# Altium PCB Terminal_Board_PCB V4.PcbDoc (part 2 of 2)
Units mm, origin at the board's own origin, x right, y up, seen from the top; angles counter-clockwise.
Board outline 240.8 x 116.8 mm, 2 copper layers (Top Layer, Bottom Layer), stack 0.74 mm thick; 18 components, 37 nets, 96 pads, 39 vias.
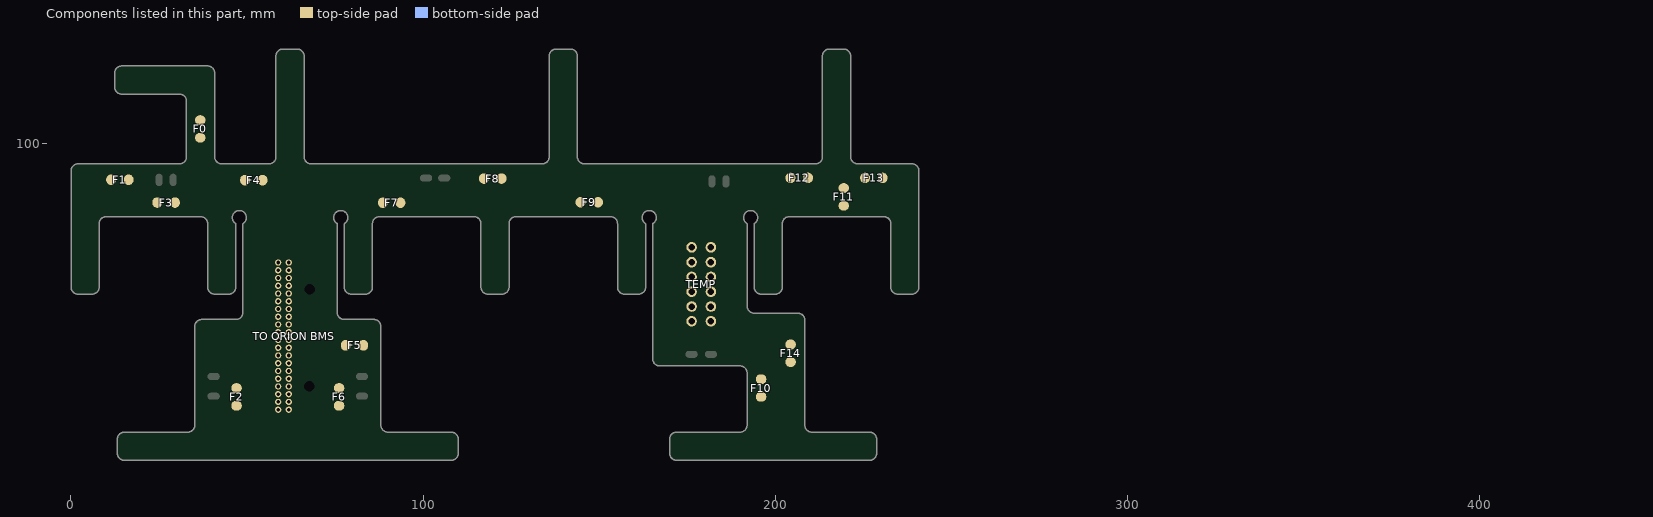
[diagram p2: the components of this part, seen from the top]

## Via types
v1: diameter 1.27, hole 0.5, Top Layer to Bottom Layer, tented both sides, 39 vias

## Nets (pads, with @x,y where several pads share a name; then routed paths per layer and width w, separated by ;. In a path a pad name is that pad's centre, name@x,y a point inside that pad or via, vN(x,y) a via of type N, cw(c..) or ccw(c..) an arc to the next point about the centre after c; other vN are vias at no path point) (continued)
copper on no net: | length 8872.6
  Top Layer w0.025: 286.048,39.384 287.858,37.573 ; 286.048,40.908 289.382,37.573 ; 286.048,42.432 290.654,37.826 ; 286.048,43.956 291.168,38.835 ; 286.048,45.48 291.168,40.359 ; 286.048,47.004 291.168,41.883 ; 286.048,48.528 291.168,43.407 ; 286.048,50.052 291.168,44.931 ; 286.048,51.576 291.168,46.455 ; 286.048,53.1 291.168,47.979 ; 286.048,54.624 291.168,49.503 ; 286.048,56.148 291.289,50.906 ; 286.048,57.672 292.112,51.607 ; 286.048,59.196 293.588,51.656 ; 286.179,60.588 295.112,51.656 ; 287.03,61.262 296.636,51.656 ; 288.52,61.296 298.16,51.656 ; 290.044,61.296 299.684,51.656 ; 291.568,61.296 301.208,51.656 ; 293.092,61.296 302.732,51.656 ; 293.978,75.649 295.697,73.931 ; 293.978,77.173 297.221,73.931 ; 294.178,78.498 298.745,73.931 ; 294.459,9.636 296.729,7.366 ; 294.459,11.16 298.253,7.366 ; 294.616,61.296 304.256,51.656 ; 294.741,7.83 294.929,7.643 ; 294.916,12.227 299.777,7.366 ; 295.113,79.087 300.269,73.931 ; 296.14,61.296 305.78,51.656 ; 296.147,12.52 301.301,7.366 ; 296.633,79.091 301.793,73.931 ; 297.664,61.296 307.304,51.656 ; 297.671,12.52 302.825,7.366 ; 298.157,79.091 303.317,73.931 ; 299.188,61.296 308.828,51.656 ; 299.195,12.52 304.349,7.366 ; 299.681,79.091 304.841,73.931 ; 300.712,61.296 316.004,46.003 ; 300.719,12.52 305.873,7.366 ; 301.205,79.091 312.157,68.138 ; 302.236,61.296 316.004,47.527 ; 302.243,12.52 307.397,7.366 ; 302.729,79.091 312.157,69.662 ; 303.76,61.296 316.004,49.051 ; 303.767,12.52 308.921,7.366 ; 304.253,79.091 312.157,71.186 ; 305.284,61.296 315.416,51.164 ; 305.291,12.52 310.445,7.366 ; 305.777,79.091 312.157,72.71 ; 306.538,61.566 315.73,52.374 ; 306.815,12.52 311.969,7.366 ; 307.036,62.591 316.896,52.732 ; 307.036,64.115 334.439,36.712 ; 307.036,65.639 334.439,38.236 ; 307.036,67.163 334.439,39.76 ; 307.036,68.687 312.157,63.566 ; 307.036,70.211 312.157,65.09 ; 307.036,71.735 312.157,66.614 ; 307.301,79.091 312.157,74.234 ; 308.059,12.801 313.493,7.366 ; 308.541,13.842 315.017,7.366 ; 308.541,15.366 316.541,7.366 ; 308.541,16.89 318.065,7.366 ; 308.541,18.414 319.589,7.366 ; 308.541,19.938 321.113,7.366 ; 308.541,21.462 322.637,7.366 ; 308.541,22.986 324.161,7.366 ; 308.541,24.51 325.685,7.366 ; 308.541,26.034 327.209,7.366 ; 308.541,27.558 328.733,7.366 ; 308.541,29.082 330.257,7.366 ; 308.541,30.606 331.781,7.366 ; 308.588,32.084 333.305,7.366 ; 308.825,79.091 312.157,75.758 ; 309.302,32.894 334.829,7.366 ; 310.349,79.091 312.157,77.282 ; 310.716,33.004 336.353,7.366 ; 310.883,38.932 312.242,37.573 ; 310.883,40.456 313.766,37.573 ; 310.883,41.98 315.199,37.665 ; 310.883,43.504 315.941,38.446 ; 310.883,45.028 316.004,39.907 ; 310.883,46.552 316.004,41.431 ; 310.883,48.076 316.004,42.955 ; 310.883,49.6 316.004,44.479 ; 312.24,33.004 337.877,7.366 ; 313.764,33.004 339.401,7.366 ; 314.428,61.296 334.439,41.284 ; 315.288,33.004 340.925,7.366 ; 315.952,61.296 334.439,42.808 ; 316.64,33.176 342.449,7.366 ; 317.262,34.077 343.973,7.366 ; 317.284,35.579 345.497,7.366 ; 317.284,37.103 347.021,7.366 ; 317.284,38.627 342.411,13.501 ; 317.284,40.151 342.37,15.066 ; 317.284,41.675 342.37,16.59 ; 317.284,43.199 342.37,18.114 ; 317.284,44.723 342.37,19.638 ; 317.284,46.247 342.37,21.162 ; 317.284,47.771 342.37,22.686 ; 317.284,49.295 342.37,24.21 ; 317.476,61.296 334.439,44.332 ; 317.512,50.592 342.37,25.734 ; 317.895,51.732 334.439,35.188 ; 319,61.296 334.439,45.856 ; 320.524,61.296 334.439,47.38 ; 322.046,61.297 334.439,48.904 ; 323.048,61.82 333.954,50.913 ; 323.301,63.09 334.098,52.294 ; 323.301,64.614 335.159,52.757 ; 323.301,66.138 340.84,48.599 ; 323.301,67.662 328.424,62.54 ; 323.301,69.186 328.422,64.065 ; 323.301,70.71 328.422,65.589 ; 323.301,72.234 328.422,67.113 ; 323.301,73.758 328.422,68.637 ; 323.301,75.282 328.422,70.161 ; 323.301,76.806 328.422,71.685 ; 323.301,78.33 328.422,73.209 ; 323.301,79.854 328.422,74.733 ; 323.372,81.308 328.422,76.257 ; 324.124,82.079 328.422,77.781 ; 325.57,82.158 328.422,79.305 ; 327.094,82.158 328.422,80.829 ; 329.666,61.298 340.84,50.123 ; 331.192,61.296 341.215,51.272 ; 332.716,61.296 342.356,51.656 ; 334.24,61.296 343.88,51.656 ; 335.719,40.004 338.15,37.573 ; 335.719,41.528 339.674,37.573 ; 335.719,43.052 340.626,38.145 ; 335.719,44.576 340.84,39.455 ; 335.719,46.1 340.84,40.979 ; 335.719,47.624 340.84,42.503 ; 335.719,49.148 340.84,44.027 ; 335.764,61.296 345.404,51.656 ; 335.803,38.396 336.542,37.657 ; 335.87,50.522 340.84,45.551 ; 336.349,51.566 340.84,47.075 ; 336.624,33.004 342.37,27.258 ; 337.288,61.296 346.928,51.656 ; 338.148,33.004 342.37,28.782 ; 338.812,61.296 348.452,51.656 ; 339.672,33.004 342.37,30.306 ; 340.336,61.296 349.976,51.656 ; 341.196,33.004 342.37,31.83 ; 341.86,61.296 351.5,51.656 ; 343.35,12.561 348.545,7.366 ; 343.384,61.296 353.024,51.656 ; 344.908,61.296 354.548,51.656 ; 344.915,12.52 350.069,7.366 ; 346.432,61.296 356.072,51.656 ; 346.439,12.52 351.593,7.366 ; 347.956,61.296 357.596,51.656 ; 347.963,12.52 353.117,7.366 ; 349.48,61.296 359.12,51.656 ; 349.487,12.52 354.641,7.366 ; 351.004,61.296 365.676,46.624 ; 351.011,12.52 355.926,7.605 ; 352.528,61.296 365.676,48.148 ; 352.535,12.52 356.452,8.603 ; 354.052,61.296 365.676,49.672 ; 354.059,12.52 356.452,10.127 ; 355.576,61.296 365.853,51.018 ; 355.694,12.41 356.341,11.762 ; 357.1,61.296 366.76,51.635 ; 358.624,61.296 368.264,51.656 ; 360.148,61.296 369.788,51.656 ; 360.555,39.552 362.534,37.573 ; 360.555,41.076 364.058,37.573 ; 360.555,42.6 365.254,37.901 ; 360.555,44.124 365.676,39.004 ; 360.555,45.648 365.676,40.528 ; 360.555,47.172 365.676,42.052 ; 360.555,48.696 365.676,43.576 ; 360.555,50.22 365.676,45.1 ; 361.672,61.296 371.312,51.656 ; 363.196,61.296 372.836,51.656 ; 364.72,61.296 374.36,51.656 ; 366.244,61.296 375.884,51.656 ; 367.768,61.296 377.408,51.656 ; 369.292,61.296 378.932,51.656 ; 370.816,61.296 380.456,51.656 ; 372.22,61.416 381.98,51.656 ; 372.924,62.235 383.504,51.656 ; 372.973,63.71 390.512,46.172 ; 372.973,65.234 390.512,47.696 ; 372.973,66.758 390.512,49.22 ; 372.973,68.282 378.094,63.162 ; 372.973,69.806 378.094,64.686 ; 372.973,71.33 378.094,66.21 ; 372.973,72.854 378.094,67.734 ; 372.973,74.378 378.094,69.258 ; 372.973,75.902 378.094,70.782 ; 372.973,77.426 378.094,72.306 ; 372.973,78.95 378.094,73.83 ; 372.973,80.474 378.094,75.354 ; 373.266,81.706 378.094,76.878 ; 374.338,82.158 378.094,78.402 ; 375.862,82.158 378.094,79.926 ; 379.96,61.296 389.887,51.369 ; 381.484,61.296 390.326,52.454 ; 383.008,61.296 391.646,52.658 ; 384.532,61.296 408.947,36.881 ; 385.391,39.1 386.918,37.573 ; 385.391,40.624 388.442,37.573 ; 385.391,42.148 389.826,37.714 ; 385.391,43.672 390.483,38.581 ; 385.391,45.196 390.512,40.076 ; 385.391,46.72 390.512,41.6 ; 385.391,48.244 390.512,43.124 ; 385.391,49.768 390.512,44.648 ; 386.056,61.296 408.947,38.405 ; 387.58,61.296 408.947,39.929 ; 389.104,61.296 408.947,41.453 ; 390.628,61.296 408.947,42.977 ; 391.683,83.42 394.217,85.954 397.265,89.002 ; 391.683,84.944 392.693,85.954 395.741,89.002 ; 391.683,86.468 394.217,89.002 ; 391.683,87.992 392.693,89.002 ; 391.683,95.612 394.217,98.146 397.265,101.194 400.313,104.242 ; 391.683,97.136 392.693,98.146 395.741,101.194 398.789,104.242 ; 391.683,98.66 394.217,101.194 397.265,104.242 ; 391.683,100.184 392.693,101.194 395.741,104.242 ; 391.683,101.708 394.217,104.242 ; 391.683,103.232 392.693,104.242 ; 391.683,113.9 394.217,116.434 397.265,119.482 ; 391.683,115.424 392.693,116.434 395.741,119.482 ; 391.683,116.948 394.217,119.482 ; 391.683,118.472 392.693,119.482 ; 391.792,26.603 393.88,24.515 ; 391.792,28.127 395.404,24.515 ; 391.792,29.651 396.928,24.515 ; 391.792,31.175 398.452,24.515 ; 391.792,32.699 399.976,24.515 ; 391.792,34.223 401.5,24.515 ; 391.792,35.747 403.024,24.515 ; 391.792,37.271 404.548,24.515 ; 391.792,38.795 406.072,24.515 ; 391.792,40.319 407.596,24.515 ; 391.792,41.843 419.438,14.198 ; 391.792,43.367 419.438,15.722 ; 391.792,44.891 419.438,17.246 ; 391.792,46.415 419.438,18.77 ; 391.792,47.939 419.438,20.294 ; 391.792,49.463 419.438,21.818 ; 392.107,50.672 419.438,23.342 ; 392.152,61.296 408.947,44.501 ; 392.334,51.97 408.951,35.353 ; 392.693,82.906 395.741,85.954 398.789,89.002 ; 392.693,95.098 395.741,98.146 398.789,101.194 401.837,104.242 ; 392.693,113.386 395.741,116.434 398.789,119.482 ; 393.676,61.296 408.947,46.025 ; 394.217,82.906 397.265,85.954 400.313,89.002 ; 394.217,95.098 397.265,98.146 400.313,101.194 403.361,104.242 ; 394.217,113.386 397.265,116.434 400.313,119.482 ; 394.865,9.815 397.313,7.366 ; 394.865,11.339 398.837,7.366 ; 394.932,8.224 395.728,7.428 ; 395.2,61.296 408.947,47.549 ; 395.427,12.3 400.361,7.366 ; 395.741,82.906 398.789,85.954 401.837,89.002 ; 395.741,95.098 398.789,98.146 401.837,101.194 404.885,104.242 ; 395.741,113.386 398.789,116.434 401.837,119.482 ; 396.724,61.296 408.947,49.073 ; 396.731,12.52 401.885,7.366 ; 397.265,82.906 400.313,85.954 403.361,89.002 ; 397.265,95.098 400.313,98.146 403.361,101.194 406.409,104.242 ; 397.265,113.386 400.313,116.434 403.361,119.482 ; 398.248,61.296 408.353,51.19 ; 398.255,12.52 403.409,7.366 ; 398.789,82.906 401.837,85.954 404.885,89.002 ; 398.789,95.098 401.837,98.146 404.885,101.194 407.933,104.242 ; 398.789,113.386 401.837,116.434 404.885,119.482 ; 399.772,61.296 408.682,52.385 ; 399.779,12.52 404.933,7.366 ; 400.313,82.906 403.361,85.954 406.409,89.002 ; 400.313,95.098 403.361,98.146 406.409,101.194 409.457,104.242 ; 400.313,113.386 403.361,116.434 406.409,119.482 ; 401.296,61.296 409.866,52.726 ; 401.303,12.52 406.457,7.366 ; 401.837,82.906 404.885,85.954 407.933,89.002 ; 401.837,95.098 404.885,98.146 407.933,101.194 410.981,104.242 ; 401.837,113.386 404.885,116.434 407.933,119.482 ; 402.82,61.296 415.348,48.768 ; 402.827,12.52 407.981,7.366 ; 403.361,82.906 406.409,85.954 409.457,89.002 ; 403.361,95.098 406.409,98.146 409.457,101.194 412.505,104.242 ; 403.361,113.386 406.409,116.434 409.457,119.482 ; 404.344,61.296 415.348,50.292 ; 404.351,12.52 409.505,7.366 ; 404.885,82.906 407.933,85.954 410.981,89.002 ; 404.885,95.098 407.933,98.146 410.981,101.194 414.029,104.242 417.077,101.194 420.125,98.146 423.173,95.098 426.221,92.05 429.269,89.002 ; 404.885,113.386 407.933,116.434 410.981,119.482 ; 405.868,61.296 415.807,51.357 ; 405.875,12.52 411.029,7.366 ; 406.409,82.906 409.457,85.954 412.505,89.002 ; 406.409,95.098 409.457,98.146 412.505,101.194 414.029,102.718 415.553,101.194 418.601,98.146 421.649,95.098 424.697,92.05 427.745,89.002 ; 406.409,113.386 409.457,116.434 412.505,119.482 ; 407.392,61.296 417.032,51.656 ; 407.399,12.52 412.553,7.366 ; 407.933,82.906 410.981,85.954 414.029,89.002 ; 407.933,95.098 410.981,98.146 414.029,101.194 417.077,98.146 420.125,95.098 423.173,92.05 426.221,89.002 ; 407.933,113.386 410.981,116.434 414.029,119.482 ; 408.559,12.884 414.077,7.366 ; 408.916,61.296 418.556,51.656 ; 408.947,14.021 415.601,7.366 ; 408.947,15.545 417.125,7.366 ; 408.947,17.069 418.649,7.366 ; 408.947,18.593 420.173,7.366 ; 408.947,20.117 421.697,7.366 ; 408.947,21.641 423.221,7.366 ; 408.947,23.165 424.745,7.366 ; 409.457,82.906 412.505,85.954 414.029,87.478 ; 409.457,95.098 412.505,98.146 414.029,99.67 415.553,98.146 418.601,95.098 421.649,92.05 424.697,89.002 ; 409.457,113.386 412.505,116.434 414.029,117.958 ; 410.144,34.16 419.438,24.866 ; 410.227,40.173 412.826,37.573 ; 410.227,41.697 414.324,37.599 ; 410.227,43.221 415.201,38.246 ; 410.227,44.745 415.348,39.624 ; 410.227,46.269 415.348,41.148 ; 410.227,47.793 415.348,42.672 ; 410.227,49.317 415.348,44.196 ; 410.247,38.629 411.283,37.593 ; 410.44,61.296 420.08,51.656 ; 410.466,50.602 415.348,45.72 ; 410.83,51.762 415.348,47.244 ; 410.981,82.906 414.029,85.954 ; 410.981,95.098 414.029,98.146 417.077,95.098 420.125,92.05 423.173,89.002 ; 410.981,113.386 414.029,116.434 ; 411.672,34.156 419.438,26.39 ; 411.964,61.296 421.604,51.656 ; 412.505,82.906 414.029,84.43 ; 412.505,95.098 414.029,96.622 415.553,95.098 418.601,92.05 421.649,89.002 ; 412.505,113.386 414.029,114.91 ; 413.196,34.156 419.438,27.914 ; 413.488,61.296 423.128,51.656 ; 414.029,90.526 415.553,89.002 ; 414.029,92.05 417.077,89.002 ; 414.029,93.574 415.553,92.05 418.601,89.002 ; 414.029,95.098 417.077,92.05 420.125,89.002 ; 414.029,105.766 415.553,104.242 418.601,101.194 421.649,98.146 424.697,95.098 427.745,92.05 430.793,89.002 ; 414.029,107.29 417.077,104.242 420.125,101.194 423.173,98.146 426.221,95.098 429.269,92.05 432.317,89.002 ; 414.029,108.814 415.553,107.29 418.601,104.242 421.649,101.194 424.697,98.146 427.745,95.098 430.793,92.05 433.841,89.002 ; 414.029,110.338 417.077,107.29 420.125,104.242 423.173,101.194 426.221,98.146 429.269,95.098 432.317,92.05 435.365,89.002 ; 414.029,111.862 415.553,110.338 418.601,107.29 421.649,104.242 424.697,101.194 427.745,98.146 430.793,95.098 433.841,92.05 436.889,89.002 ; 414.029,113.386 417.077,110.338 420.125,107.29 423.173,104.242 426.221,101.194 429.269,98.146 432.317,95.098 435.365,92.05 438.413,89.002 ; 414.72,34.156 419.438,29.438 ; 415.012,61.296 424.652,51.656 ; 415.553,113.386 418.601,110.338 421.649,107.29 424.697,104.242 427.745,101.194 430.793,98.146 433.841,95.098 436.889,92.05 439.937,89.002 ; 416.244,34.156 419.438,30.962 ; 416.536,61.296 426.176,51.656 ; 417.077,113.386 420.125,110.338 423.173,107.29 426.221,104.242 429.269,101.194 432.317,98.146 435.365,95.098 438.413,92.05 440.184,90.279 ; 417.768,34.156 419.438,32.486 ; 418.06,61.296 427.7,51.656 ; 418.601,113.386 421.649,110.338 424.697,107.29 427.745,104.242 430.793,101.194 433.841,98.146 436.889,95.098 439.937,92.05 440.184,91.803 ; 419.584,61.296 429.224,51.656 ; 420.125,113.386 423.173,110.338 426.221,107.29 429.269,104.242 432.317,101.194 435.365,98.146 438.413,95.098 440.184,93.327 ; 421.108,61.296 430.748,51.656 ; 421.115,12.52 426.269,7.366 ; 421.649,113.386 424.697,110.338 427.745,107.29 430.793,104.242 433.841,101.194 436.889,98.146 439.937,95.098 440.184,94.851 ; 422.259,61.669 432.272,51.656 ; 422.639,12.52 427.793,7.366 ; 422.645,62.807 433.797,51.655 ; 422.645,64.331 440.184,46.792 ; 422.645,65.855 440.184,48.316 ; 422.645,67.379 427.822,62.201 ; 422.645,68.903 427.766,63.782 ; 422.645,70.427 427.766,65.306 ; 422.645,71.951 427.766,66.83 ; 422.645,73.475 427.766,68.354 ; 422.645,74.999 427.766,69.878 ; 422.645,76.523 427.766,71.402 ; 422.645,78.047 427.766,72.926 ; 422.645,79.571 427.766,74.45 ; 422.659,81.08 427.766,75.974 ; 423.173,113.386 426.221,110.338 429.269,107.29 432.317,104.242 435.365,101.194 438.413,98.146 440.184,96.375 ; 423.275,81.988 427.766,77.498 ; 424.163,12.52 429.317,7.366 ; 424.63,82.158 427.766,79.022 ; 424.697,113.386 427.745,110.338 430.793,107.29 433.841,104.242 436.889,101.194 439.937,98.146 440.184,97.899 ; 425.687,12.52 430.841,7.366 ; 426.154,82.158 427.766,80.546 ; 426.221,113.386 429.269,110.338 432.317,107.29 435.365,104.242 438.413,101.194 440.184,99.423 ; 427.211,12.52 432.059,7.673 ; 427.745,113.386 430.793,110.338 433.841,107.29 436.889,104.242 439.937,101.194 440.184,100.947 ; 428.671,61.352 440.184,49.84 ; 428.735,12.52 432.496,8.759 ; 429.269,113.386 432.317,110.338 435.365,107.29 438.413,104.242 440.184,102.471 ; 430.252,61.296 440.184,51.364 ; 430.259,12.52 432.496,10.283 ; 430.793,113.386 433.841,110.338 436.889,107.29 439.937,104.242 440.184,103.995 ; 431.776,61.296 440.184,52.888 ; 432.317,113.386 435.365,110.338 438.413,107.29 440.184,105.519 ; 433.3,61.296 440.184,54.412 ; 433.841,113.386 436.889,110.338 439.937,107.29 440.184,107.043 ; 434.824,61.296 440.184,55.936 ; 435.063,39.721 437.21,37.573 ; 435.063,41.245 438.734,37.573 ; 435.063,42.769 439.846,37.986 ; 435.063,44.293 440.184,39.172 ; 435.063,45.817 440.184,40.696 ; 435.063,47.341 440.184,42.22 ; 435.063,48.865 440.184,43.744 ; 435.062,50.389 440.184,45.268 ; 435.365,113.386 438.413,110.338 440.184,108.567 ; 436.348,61.296 440.184,57.46 ; 436.889,113.386 439.937,110.338 440.184,110.091 ; 437.872,61.296 440.184,58.984 ; 438.413,113.386 440.184,111.615 ; 439.604,61.087 439.975,60.717 ; 439.937,113.386 440.184,113.139
  Top Layer w0.381: 286.048,85.954 296.459,85.954 346.482,85.954 360.703,85.954 377.209,85.954 391.683,85.954 414.029,85.954 440.184,85.954 ; 286.048,89.002 296.459,89.002 346.482,89.002 360.703,89.002 377.209,89.002 391.683,89.002 414.029,89.002 440.184,89.002 ; 286.048,92.05 296.459,92.05 346.482,92.05 360.703,92.05 377.209,92.05 391.683,92.05 414.029,92.05 440.184,92.05 ; 286.048,95.098 296.459,95.098 346.482,95.098 360.703,95.098 377.209,95.098 391.683,95.098 414.029,95.098 440.184,95.098 ; 286.048,98.146 296.459,98.146 346.482,98.146 360.703,98.146 377.209,98.146 391.683,98.146 414.029,98.146 440.184,98.146 ; 286.048,101.194 296.459,101.194 346.482,101.194 360.703,101.194 377.209,101.194 391.683,101.194 414.029,101.194 440.184,101.194 ; 286.048,104.242 296.459,104.242 346.482,104.242 360.703,104.242 377.209,104.242 391.683,104.242 414.029,104.242 440.184,104.242 ; 286.048,107.29 296.459,107.29 346.482,107.29 360.703,107.29 377.209,107.29 391.683,107.29 414.029,107.29 440.184,107.29 ; 286.048,110.338 296.459,110.338 346.482,110.338 360.703,110.338 377.209,110.338 391.683,110.338 414.029,110.338 440.184,110.338 ; 286.048,113.386 296.459,113.386 346.482,113.386 360.703,113.386 377.209,113.386 391.683,113.386 414.029,113.386 440.184,113.386 ; 286.048,116.434 296.459,116.434 346.482,116.434 360.703,116.434 377.209,116.434 391.683,116.434 414.029,116.434 440.184,116.434 ; 286.048,119.482 440.184,119.482 ; 296.459,122.53 296.459,82.906 ; 346.482,122.53 346.482,82.906 ; 360.703,122.53 360.703,82.906 ; 377.209,122.53 377.209,82.906 ; 391.683,122.53 391.683,82.906 ; 414.029,122.53 414.029,82.906 ; 296.459,82.906 286.048,82.906 286.048,122.53 440.184,122.53 440.184,82.906 414.029,82.906 ; 296.459,82.906 346.482,82.906 ; 346.482,82.906 360.703,82.906 ; 360.703,82.906 377.209,82.906 ; 377.209,82.906 391.683,82.906 ; 391.683,82.906 414.029,82.906 ; 286.048,38.747 286.048,38.873 286.048,59.996 286.048,60.122 286.097,60.37 286.193,60.603 286.333,60.812 286.512,60.991 286.721,61.131 286.954,61.227 287.202,61.277 287.328,61.277 305.756,61.277 305.882,61.283 306.128,61.332 306.36,61.428 306.568,61.567 306.746,61.745 306.885,61.953 306.981,62.185 307.03,62.431 307.036,62.557 307.036,72.67 307.03,72.796 306.981,73.042 306.885,73.274 306.746,73.482 306.568,73.66 306.36,73.799 306.128,73.895 305.882,73.944 305.756,73.95 295.259,73.95 295.132,73.95 294.885,74 294.652,74.096 294.442,74.236 294.264,74.415 294.124,74.624 294.028,74.857 293.978,75.105 293.978,75.231 293.978,77.791 293.978,77.917 294.028,78.165 294.124,78.398 294.264,78.607 294.442,78.786 294.652,78.926 294.885,79.022 295.132,79.071 295.259,79.071 310.877,79.071 311.003,79.071 311.25,79.022 311.483,78.926 311.693,78.786 311.871,78.607 312.012,78.398 312.108,78.165 312.157,77.917 312.157,77.791 312.157,62.557 312.163,62.431 312.212,62.185 312.308,61.953 312.448,61.745 312.625,61.567 312.834,61.428 313.066,61.332 313.312,61.283 313.437,61.277 317.729,61.277 322.021,61.277 322.147,61.283 322.393,61.332 322.625,61.428 322.833,61.567 323.011,61.745 323.15,61.953 323.246,62.185 323.295,62.431 323.301,62.557 323.301,80.864 323.301,80.99 323.351,81.237 323.447,81.47 323.587,81.68 323.676,81.769 323.765,81.858 323.975,81.998 324.208,82.095 324.455,82.144 324.582,82.144 325.862,82.144 327.142,82.144 327.268,82.144 327.515,82.095 327.748,81.998 327.958,81.858 328.047,81.769 328.136,81.68 328.276,81.47 328.373,81.237 328.422,80.99 328.422,80.864 328.422,62.557 328.428,62.431 328.477,62.185 328.573,61.953 328.713,61.745 328.89,61.567 329.099,61.428 329.331,61.332 329.577,61.283 329.702,61.277 350.698,61.277 371.693,61.277 371.818,61.283 372.065,61.332 372.296,61.428 372.505,61.567 372.683,61.745 372.822,61.953 372.918,62.185 372.967,62.431 372.973,62.557 372.973,80.864 372.973,80.99 373.022,81.237 373.119,81.47 373.259,81.68 373.437,81.858 373.647,81.998 373.88,82.095 374.127,82.144 374.253,82.144 375.534,82.144 376.814,82.144 376.94,82.144 377.187,82.095 377.42,81.998 377.63,81.858 377.719,81.769 377.808,81.68 377.948,81.47 378.045,81.237 378.094,80.99 378.094,80.864 378.094,62.557 378.1,62.431 378.149,62.185 378.245,61.953 378.385,61.745 378.562,61.567 378.771,61.428 379.003,61.332 379.249,61.283 379.374,61.277 400.369,61.277 421.365,61.277 421.49,61.283 421.736,61.332 421.968,61.428 422.177,61.567 422.354,61.745 422.494,61.953 422.59,62.185 422.639,62.431 422.645,62.557 422.645,80.864 422.645,80.99 422.694,81.237 422.791,81.47 422.931,81.68 423.109,81.858 423.319,81.998 423.552,82.095 423.799,82.144 423.925,82.144 425.205,82.144 426.486,82.144 426.569,82.144 426.736,82.122 426.898,82.078 427.053,82.014 427.198,81.93 427.331,81.828 427.45,81.71 427.552,81.576 427.594,81.504 427.636,81.431 427.7,81.276 427.744,81.114 427.766,80.947 427.766,80.864 427.766,62.557 427.772,62.431 427.821,62.185 427.917,61.953 428.056,61.745 428.234,61.567 428.442,61.428 428.674,61.332 428.92,61.283 429.046,61.277 438.904,61.277 439.03,61.277 439.277,61.227 439.51,61.131 439.72,60.991 439.809,60.902 439.898,60.812 440.038,60.603 440.135,60.37 440.184,60.122 440.184,59.996 440.184,38.873 440.184,38.747 440.135,38.5 440.038,38.267 439.898,38.057 439.72,37.879 439.51,37.738 439.277,37.642 439.03,37.593 438.903,37.593 436.343,37.593 436.217,37.593 435.97,37.642 435.737,37.738 435.527,37.879 435.349,38.057 435.209,38.267 435.112,38.5 435.063,38.747 435.063,38.873 435.063,50.395 435.057,50.52 435.008,50.766 434.912,50.998 434.772,51.207 434.595,51.384 434.386,51.524 434.154,51.62 433.908,51.669 433.783,51.675 416.628,51.675 416.525,51.671 416.322,51.638 416.127,51.573 415.945,51.477 415.86,51.419 415.802,51.373 415.694,51.271 415.599,51.157 415.518,51.033 415.452,50.9 415.401,50.761 415.367,50.616 415.35,50.469 415.348,50.395 415.348,38.873 415.348,38.747 415.299,38.5 415.202,38.267 415.062,38.057 414.884,37.879 414.674,37.738 414.441,37.642 414.194,37.593 414.068,37.593 411.507,37.593 411.381,37.593 411.134,37.642 410.901,37.739 410.691,37.879 410.602,37.968 410.513,38.057 410.373,38.267 410.276,38.5 410.227,38.747 410.227,38.873 410.227,50.395 410.344,50.471 410.549,50.659 410.709,50.888 410.816,51.145 410.864,51.42 410.852,51.698 410.78,51.967 410.651,52.215 410.472,52.428 410.251,52.598 409.998,52.716 409.726,52.776 409.447,52.776 409.175,52.716 408.923,52.598 408.702,52.428 408.522,52.215 408.394,51.967 408.322,51.698 408.309,51.42 408.358,51.145 408.465,50.888 408.624,50.659 408.83,50.471 408.947,50.395 408.947,35.416 408.953,35.291 409.002,35.045 409.098,34.813 409.237,34.604 409.415,34.427 409.624,34.287 409.855,34.191 410.102,34.142 410.227,34.136 418.158,34.136 418.284,34.136 418.531,34.087 418.764,33.991 418.974,33.85 419.063,33.761 419.152,33.672 419.292,33.462 419.389,33.229 419.438,32.982 419.438,32.856 419.438,13.781 419.444,13.656 419.493,13.409 419.589,13.178 419.729,12.969 419.906,12.791 420.115,12.652 420.347,12.556 420.593,12.507 420.718,12.501 431.216,12.501 431.342,12.501 431.589,12.452 431.822,12.355 432.032,12.215 432.21,12.037 432.35,11.827 432.447,11.594 432.496,11.347 432.496,11.221 432.496,9.94 432.496,8.66 432.496,8.534 432.447,8.287 432.35,8.054 432.21,7.844 432.121,7.755 432.032,7.666 431.822,7.526 431.589,7.429 431.342,7.38 431.216,7.38 396.145,7.38 396.019,7.38 395.771,7.429 395.538,7.526 395.329,7.666 395.24,7.755 395.15,7.844 395.01,8.054 394.914,8.287 394.865,8.534 394.865,8.66 394.865,9.94 394.865,11.221 394.865,11.347 394.914,11.594 395.01,11.827 395.15,12.037 395.329,12.215 395.538,12.355 395.771,12.452 396.019,12.501 396.145,12.501 407.667,12.501 407.792,12.507 408.038,12.556 408.27,12.652 408.479,12.791 408.572,12.876 408.656,12.969 408.796,13.178 408.892,13.409 408.941,13.656 408.947,13.781 408.947,18.518 408.947,23.255 408.941,23.38 408.892,23.626 408.796,23.858 408.656,24.067 408.479,24.244 408.27,24.384 408.038,24.48 407.792,24.529 407.667,24.535 393.072,24.535 392.946,24.535 392.699,24.584 392.466,24.68 392.256,24.821 392.078,24.999 391.938,25.209 391.841,25.442 391.792,25.689 391.792,25.815 391.792,50.395 391.909,50.471 392.114,50.659 392.274,50.888 392.381,51.145 392.429,51.42 392.417,51.698 392.345,51.967 392.216,52.215 392.037,52.428 391.816,52.598 391.563,52.716 391.291,52.776 391.013,52.776 390.74,52.716 390.488,52.598 390.267,52.428 390.088,52.215 389.959,51.967 389.887,51.698 389.875,51.42 389.923,51.145 390.03,50.888 390.19,50.659 390.395,50.471 390.512,50.395 390.512,38.873 390.512,38.747 390.463,38.5 390.366,38.267 390.226,38.057 390.048,37.879 389.838,37.738 389.605,37.642 389.358,37.593 389.232,37.593 386.671,37.593 386.545,37.593 386.298,37.642 386.065,37.738 385.855,37.879 385.677,38.057 385.537,38.267 385.44,38.5 385.391,38.747 385.391,38.873 385.391,50.395 385.385,50.52 385.336,50.766 385.24,50.998 385.1,51.207 384.923,51.384 384.714,51.524 384.483,51.62 384.236,51.669 384.111,51.675 366.956,51.675 366.831,51.669 366.585,51.62 366.353,51.524 366.144,51.384 365.967,51.207 365.827,50.998 365.731,50.766 365.682,50.52 365.676,50.395 365.676,38.873 365.676,38.747 365.627,38.5 365.53,38.267 365.39,38.057 365.212,37.879 365.002,37.738 364.769,37.642 364.522,37.593 364.396,37.593 361.835,37.593 361.709,37.593 361.462,37.642 361.229,37.739 361.019,37.879 360.93,37.968 360.841,38.057 360.701,38.267 360.604,38.5 360.555,38.747 360.555,38.873 360.555,50.395 360.549,50.52 360.5,50.766 360.404,50.998 360.265,51.207 360.087,51.384 359.878,51.524 359.647,51.62 359.4,51.669 359.275,51.675 342.12,51.675 341.995,51.669 341.749,51.62 341.517,51.524 341.308,51.384 341.131,51.207 340.991,50.998 340.895,50.766 340.846,50.52 340.84,50.395 340.84,38.873 340.84,38.747 340.791,38.5 340.694,38.267 340.554,38.057 340.465,37.968 340.376,37.879 340.166,37.738 339.933,37.642 339.686,37.593 339.56,37.593 337,37.593 336.873,37.593 336.626,37.642 336.393,37.738 336.183,37.879 336.005,38.057 335.865,38.267 335.768,38.5 335.719,38.747 335.719,38.873 335.719,50.395 335.836,50.471 336.042,50.659 336.202,50.888 336.308,51.145 336.357,51.42 336.344,51.698 336.272,51.967 336.144,52.215 335.964,52.428 335.743,52.598 335.491,52.716 335.219,52.776 334.94,52.776 334.668,52.716 334.415,52.598 334.194,52.428 334.015,52.215 333.886,51.967 333.814,51.698 333.802,51.42 333.85,51.145 333.957,50.888 334.117,50.659 334.322,50.471 334.439,50.395 334.439,42.33 334.439,34.264 334.445,34.139 334.494,33.893 334.59,33.661 334.73,33.452 334.907,33.275 335.116,33.135 335.348,33.039 335.594,32.99 335.719,32.984 341.09,32.984 341.216,32.984 341.463,32.935 341.696,32.838 341.906,32.698 342.084,32.52 342.224,32.31 342.321,32.077 342.37,31.83 342.37,31.704 342.37,13.781 342.376,13.656 342.425,13.409 342.521,13.178 342.661,12.969 342.838,12.791 343.047,12.652 343.279,12.556 343.525,12.507 343.65,12.501 355.172,12.501 355.298,12.501 355.545,12.452 355.778,12.355 355.988,12.215 356.166,12.037 356.306,11.827 356.403,11.594 356.452,11.347 356.452,11.221 356.452,8.66 356.452,8.534 356.403,8.287 356.306,8.054 356.166,7.844 355.988,7.666 355.778,7.526 355.545,7.429 355.298,7.38 355.172,7.38 295.739,7.38 295.613,7.38 295.366,7.429 295.133,7.526 294.923,7.666 294.745,7.844 294.605,8.054 294.508,8.287 294.459,8.534 294.459,8.66 294.459,11.221 294.459,11.347 294.508,11.594 294.605,11.827 294.745,12.037 294.923,12.215 295.133,12.355 295.366,12.452 295.613,12.501 295.739,12.501 307.261,12.501 307.387,12.507 307.633,12.556 307.865,12.652 308.073,12.791 308.166,12.876 308.251,12.969 308.39,13.178 308.486,13.409 308.535,13.656 308.541,13.781 308.541,31.704 308.541,31.83 308.591,32.077 308.687,32.31 308.827,32.52 309.005,32.698 309.215,32.838 309.448,32.935 309.695,32.984 309.822,32.984 316.004,32.984 316.13,32.99 316.376,33.039 316.608,33.135 316.816,33.275 316.994,33.452 317.133,33.661 317.229,33.893 317.278,34.139 317.284,34.264 317.284,42.33 317.284,50.395 317.401,50.471 317.607,50.659 317.767,50.888 317.873,51.145 317.922,51.42 317.91,51.698 317.837,51.967 317.709,52.215 317.53,52.428 317.308,52.598 317.056,52.716 316.784,52.776 316.505,52.776 316.233,52.716 315.98,52.598 315.759,52.428 315.58,52.215 315.451,51.967 315.379,51.698 315.367,51.42 315.415,51.145 315.522,50.888 315.682,50.659 315.887,50.471 316.004,50.395 316.004,38.873 316.004,38.747 315.955,38.5 315.859,38.267 315.718,38.057 315.54,37.879 315.33,37.738 315.097,37.642 314.85,37.593 314.724,37.593 312.164,37.593 312.038,37.593 311.79,37.642 311.557,37.739 311.348,37.879 311.258,37.968 311.169,38.057 311.029,38.267 310.933,38.5 310.883,38.747 310.883,38.873 310.883,50.395 310.877,50.52 310.828,50.766 310.732,50.998 310.593,51.207 310.415,51.384 310.207,51.524 309.975,51.62 309.729,51.669 309.603,51.675 292.449,51.675 292.323,51.669 292.077,51.62 291.845,51.524 291.636,51.384 291.459,51.207 291.32,50.998 291.223,50.766 291.175,50.52 291.168,50.395 291.168,38.873 291.168,38.747 291.119,38.5 291.023,38.267 290.883,38.057 290.793,37.968 290.704,37.879 290.495,37.738 290.262,37.642 290.014,37.593 289.888,37.593 287.328,37.593 287.202,37.593 286.954,37.642 286.721,37.738 286.512,37.879 286.333,38.057 286.193,38.267 286.097,38.5 286.048,38.747

## Polygon pours and split planes (outlines as drawn)
no net on Layer0 "Default Coverlay 1 Top" (split plane): 788 vertices, not listed, extent 0.013,9.893 240.813,126.693
no net on Layer0 "Default Coverlay 1 Bottom" (split plane): 788 vertices, not listed, extent 0.013,9.893 240.813,126.693

## Other copper
Top Layer:
  text "Layer" at 287.826,120.244 h1.52
  text "Name" at 298.237,120.244 h1.52
  text "Material" at 348.26,120.244 h1.52
  text "Thickness" at 362.481,120.244 h1.52
  text "Constant" at 378.987,120.244 h1.52
  text "Main Flex PCB" at 393.461,120.244 h1.52
  text "Header Stiffener" at 415.807,120.244 h1.52
  text "Main Flex PCB Top Coverlay" at 298.237,117.196 h1.52
  text "FHK" at 348.26,117.196 h1.52
  text "0.025mm" at 362.481,117.196 h1.52
  text "3.6" at 378.987,117.196 h1.52
  text "Coverlay Adhesive Top" at 298.237,114.148 h1.52
  text "PP-006" at 348.26,114.148 h1.52
  text "0.065mm" at 362.481,114.148 h1.52
  text "4.1" at 378.987,114.148 h1.52
  text "Stiffener and Adhesive" at 298.237,111.1 h1.52
  text "MHK" at 348.26,111.1 h1.52
  text "0.265mm" at 362.481,111.1 h1.52
  text "3.6" at 378.987,111.1 h1.52
  text "Header Stiffener Top Coverlay" at 298.237,108.052 h1.52
  text "FHK1035" at 348.26,108.052 h1.52
  text "0.025mm" at 362.481,108.052 h1.52
  text "3.6" at 378.987,108.052 h1.52
  text "Coverlay Adhesive Top" at 298.237,105.004 h1.52
  text "PP-006" at 348.26,105.004 h1.52
  text "0.065mm" at 362.481,105.004 h1.52
  text "4.1" at 378.987,105.004 h1.52
  text "1" at 287.826,101.956 h1.52
  text "Top Layer" at 298.237,101.956 h1.52
  text "R-F775" at 348.26,101.956 h1.52
  text "0.070mm" at 362.481,101.956 h1.52
  text "Polyimide" at 298.237,98.908 h1.52
  text "R-F775" at 348.26,98.908 h1.52
  text "0.075mm" at 362.481,98.908 h1.52
  text "3.2" at 378.987,98.908 h1.52
  text "2" at 287.826,95.86 h1.52
  text "Bottom Layer" at 298.237,95.86 h1.52
  text "R-F775" at 348.26,95.86 h1.52
  text "0.070mm" at 362.481,95.86 h1.52
  text "Coverlay Adhesive Bottom" at 298.237,92.812 h1.52
  text "PP-006" at 348.26,92.812 h1.52
  text "0.065mm" at 362.481,92.812 h1.52
  text "4.1" at 378.987,92.812 h1.52
  text "Header Stiffener Bottom Coverlay" at 298.237,89.764 h1.52
  text "FHK" at 348.26,89.764 h1.52
  text "0.025mm" at 362.481,89.764 h1.52
  text "3.6" at 378.987,89.764 h1.52
  text "Coverlay Adhesive Bottom" at 298.237,86.716 h1.52
  text "PP-006" at 348.26,86.716 h1.52
  text "0.065mm" at 362.481,86.716 h1.52
  text "4.1" at 378.987,86.716 h1.52
  text "Main Flex PCB Bottom Coverlay" at 298.237,83.668 h1.52
  text "FHK" at 348.26,83.668 h1.52
  text "0.025mm" at 362.481,83.668 h1.52
  text "3.6" at 378.987,83.668 h1.52

## Silkscreen, mask and mechanical layers (free items; w line width, h text height)
Top Overlay:
  circle w0.127: c68.045,81.553 r0.152
  circle w0.508: c68.045,80.017 r0.051
  circle w0.127: c129.87,87.528 r0.152
  circle w0.508: c129.87,85.992 r0.051
  circle w0.508: c4.115,80.811 r0.051
  circle w0.127: c4.115,82.347 r0.152
  circle w0.508: c233.045,82.767 r0.051
  circle w0.127: c233.045,84.303 r0.152
  circle w0.508: c40.894,43.27 r0.051
  circle w0.127: c40.894,44.806 r0.152
  lines w0.254: 4.115,82.601 4.115,81.311 ; 40.894,45.06 40.894,43.77 ; 68.045,81.807 68.045,80.517 ; 129.87,87.782 129.87,86.492 ; 233.045,84.557 233.045,83.267 ; 4.115,81.311 3.802,82.601 4.428,82.601 4.115,81.311 ; 40.894,43.77 40.581,45.06 41.207,45.06 40.894,43.77 ; 68.045,80.517 68.358,81.807 67.732,81.807 68.045,80.517 ; 129.87,86.492 130.183,87.782 129.557,87.782 129.87,86.492 ; 233.045,83.267 232.732,84.557 233.358,84.557 233.045,83.267
  lines w0.762: 1.575,80.061 6.655,80.061 4.115,84.46 1.575,80.061 ; 38.354,42.52 43.434,42.52 40.894,46.919 38.354,42.52 ; 65.505,79.267 68.045,83.666 70.585,79.267 65.505,79.267 ; 127.33,85.242 129.87,89.641 132.41,85.242 127.33,85.242 ; 230.505,82.017 235.585,82.017 233.045,86.416 230.505,82.017
  text "T1+" at 31.179,90.477 h1
  text "T-" at 21.643,90.096 h1
  text "T-" at 108.282,89.994 h1
  text "T5+" at 174.932,89.842 h1
  text "T-" at 188.407,88.94 h1
  text "T3+" at 95.659,88.293 h1
  text "HV" at 128.571,82.905 h1.52
  text "HV" at 231.746,79.68 h1.52
  text "HV" at 2.816,77.673 h1.52
  text "HV" at 66.746,76.93 h1.52
  text "HV" at 39.544,40.132 h1.52
  text "T-" at 184.254,39.601 h1
  text "T6+" at 170.97,39.499 h1
  text "T-" at 82.235,35.473 h1
  text "T-" at 37.645,35.359 h1
  text "T2+" at 40.058,25.072 h1
  text "T4+" at 81.6,24.932 h1
  text "Pheonix Accumulator" at 194.1,15.586 h1.52
  text "Terminal Board" at 195.905,14.138 h1.52
  text "B. Reed" at 198.137,12.792 h1.52
Mechanical 1:
  circle w0.013: c224.803,13.893 r1.6
  circle w0.013: c174.013,13.893 r1.6
  circle w0.013: c106.003,13.893 r1.6
  circle w0.013: c17.154,13.893 r1.6
  circle w0.013: c217.413,122.693 r1.6
  circle w0.013: c139.813,122.693 r1.6
  circle w0.013: c16.403,117.893 r1.6
  circle w0.013: c62.213,122.693 r1.6
  circle w0.013: c236.813,61.093 r1.6
  circle w0.013: c198.013,61.093 r1.6
  circle w0.013: c159.213,61.093 r1.6
  circle w0.013: c120.413,61.093 r1.6
  circle w0.013: c81.613,61.093 r1.6
  circle w0.013: c42.813,61.093 r1.6
  circle w0.013: c4.013,61.093 r1.6
  lines w0.013: 68.213,94.093 cw(c68.213,96.093) 66.213,96.093 66.213,124.693 ccw(c64.213,124.693) 64.213,126.693 60.213,126.693 ccw(c60.213,124.693) 58.213,124.693 58.213,96.093 cw(c56.213,96.093) 56.213,94.093 42.803,94.093 cw(c42.803,96.093) 40.803,96.093 40.803,119.893 ccw(c38.803,119.893) 38.803,121.893 14.403,121.893 ccw(c14.403,119.893) 12.403,119.893 12.403,115.893 ccw(c14.403,115.893) 14.403,113.893 30.803,113.893 cw(c30.803,111.893) 32.803,111.893 32.803,96.093 cw(c30.803,96.093) 30.803,94.093 2.013,94.093 ccw(c2.013,92.093) 0.013,92.093 0.013,59.093 ccw(c2.013,59.093) 2.013,57.093 6.013,57.093 ccw(c6.013,59.093) 8.013,59.093 8.013,77.093 cw(c10.013,77.093) 10.013,79.093 36.813,79.093 cw(c36.813,77.093) 38.813,77.093 38.813,59.093 ccw(c40.813,59.093) 40.813,57.093 44.813,57.093 ccw(c44.813,59.093) 46.813,59.093 46.813,77.093 cw(c47.813,78.825) 48.813,77.093 48.813,51.893 cw(c46.813,51.893) 46.813,49.893 37.154,49.893 ccw(c37.154,47.893) 35.154,47.893 35.154,19.893 cw(c33.154,19.893) 33.154,17.893 15.154,17.893 ccw(c15.154,15.893) 13.154,15.893 13.154,11.893 ccw(c15.154,11.893) 15.154,9.893 108.003,9.893 ccw(c108.003,11.893) 110.003,11.893 110.003,15.893 ccw(c108.003,15.893) 108.003,17.893 90.003,17.893 cw(c90.003,19.893) 88.003,19.893 88.003,47.893 ccw(c86.003,47.893) 86.003,49.893 77.613,49.893 cw(c77.613,51.893) 75.613,51.893 75.613,77.093 cw(c76.613,78.825) 77.613,77.093 77.613,59.093 ccw(c79.613,59.093) 79.613,57.093 83.613,57.093 ccw(c83.613,59.093) 85.613,59.093 85.613,77.093 cw(c87.613,77.093) 87.613,79.093 ; 114.413,79.093 cw(c114.413,77.093) 116.413,77.093 116.413,59.093 ccw(c118.413,59.093) 118.413,57.093 122.413,57.093 ccw(c122.413,59.093) 124.413,59.093 124.413,77.093 ; 126.413,79.093 153.213,79.093 cw(c153.213,77.093) 155.213,77.093 155.213,59.093 ccw(c157.213,59.093) 157.213,57.093 161.213,57.093 ccw(c161.213,59.093) 163.213,59.093 163.213,77.093 cw(c164.213,78.825) 165.213,77.093 165.213,38.693 ccw(c167.213,38.693) 167.213,36.693 190.013,36.693 cw(c190.013,34.693) 192.013,34.693 192.013,19.893 cw(c190.013,19.893) 190.013,17.893 172.013,17.893 ccw(c172.013,15.893) 170.013,15.893 170.013,11.893 ccw(c172.013,11.893) 172.013,9.893 226.803,9.893 ccw(c226.803,11.893) 228.803,11.893 228.803,15.893 ccw(c226.803,15.893) 226.803,17.893 210.403,17.893 cw(c210.403,19.893) 208.403,19.893 208.403,49.693 ccw(c206.403,49.693) 206.403,51.693 194.013,51.693 cw(c194.013,53.693) 192.013,53.693 192.013,77.093 cw(c193.013,78.825) 194.013,77.093 194.013,59.093 ccw(c196.013,59.093) 196.013,57.093 200.013,57.093 ccw(c200.013,59.093) 202.013,59.093 202.013,77.093 cw(c204.013,77.093) 204.013,79.093 230.813,79.093 cw(c230.813,77.093) 232.813,77.093 232.813,59.093 ccw(c234.813,59.093) 234.813,57.093 238.813,57.093 ccw(c238.813,59.093) 240.813,59.093 240.813,92.093 ccw(c238.813,92.093) 238.813,94.093 223.413,94.093 cw(c223.413,96.093) 221.413,96.093 221.413,124.693 ccw(c219.413,124.693) 219.413,126.693 215.413,126.693 ccw(c215.413,124.693) 213.413,124.693 213.413,96.093 cw(c211.413,96.093) 211.413,94.093 145.813,94.093 cw(c145.813,96.093) 143.813,96.093 143.813,124.693 ccw(c141.813,124.693) 141.813,126.693 137.813,126.693 ccw(c137.813,124.693) 135.813,124.693 135.813,96.093
Drill Drawing:
  circle w0.254: c0.18,171.362 r0.847
  lines w0.254: -0.667,160.778 1.027,160.778 0.18,159.085 -0.667,160.778 ; -0.667,163.318 -0.243,163.318 0.18,162.895 0.603,163.318 1.027,163.318 0.603,163.742 1.027,164.165 0.603,164.165 0.18,164.588 -0.243,164.165 -0.667,164.165 -0.243,163.742 -0.667,163.318 ; -0.667,166.705 1.027,166.705 1.027,168.398 -0.667,168.398 -0.667,166.705
  lines w0.381: -2.185,157.942 275.715,157.942 ; -2.185,173.182 275.715,173.182 ; 11.807,154.132 11.807,176.992 ; 25.519,154.132 25.519,176.992 ; 54.467,154.132 54.467,176.992 ; 67.316,154.132 67.316,176.992 ; 85.955,154.132 85.955,176.992 ; 124.043,154.132 124.043,176.992 ; 139.026,154.132 139.026,176.992 ; 157.969,154.132 157.969,176.992 ; 185.139,154.132 185.139,176.992 ; 206.825,154.132 206.825,176.992 ; 240.698,154.132 240.698,176.992 ; -2.185,154.132 275.715,154.132 275.715,176.992 -2.185,176.992 -2.185,154.132
  text "Symbol" at 0.101,174.325 h1.83
  text "Count" at 12.95,174.325 h1.83
  text "Hole Size" at 26.662,174.325 h1.83
  text "Plated" at 55.61,174.325 h1.83
  text "Hole Type" at 68.459,174.325 h1.83
  text "Drill Layer Pair" at 87.098,174.325 h1.83
  text "Via/Pad" at 125.186,174.325 h1.83
  text "Pad Shape" at 140.169,174.325 h1.83
  text "Template" at 159.112,174.325 h1.83
  text "Description" at 186.282,174.325 h1.83
  text "Hole Tolerance (+)" at 207.968,174.325 h1.83
  text "Hole Tolerance (-)" at 241.841,174.325 h1.83
  text "2" at 12.95,170.515 h1.52
  text "114.49mil (2.908mm)" at 26.662,170.515 h1.52
  text "NPTH" at 55.61,170.515 h1.52
  text "Round" at 68.459,170.515 h1.52
  text "Top Layer - Bottom Layer" at 87.098,170.515 h1.52
  text "Pad" at 125.186,170.515 h1.52
  text "Rounded" at 140.169,170.515 h1.52
  text "c0hn291" at 159.112,170.515 h1.52
  text "NOTES:" at 293.379,169.456 h1.52
  text "12" at 12.95,166.705 h1.52
  text "72.84mil (1.850mm)" at 26.662,166.705 h1.52
  text "PTH" at 55.61,166.705 h1.52
  text "Round" at 68.459,166.705 h1.52
  text "Top Layer - Bottom Layer" at 87.098,166.705 h1.52
  text "Pad" at 125.186,166.705 h1.52
  text "Rounded" at 140.169,166.705 h1.52
  text "c300h185m313" at 159.112,166.705 h1.52
  text "QUANTITY: 5" at 293.379,166.061 h1.52
  text "39" at 12.95,162.895 h1.52
  text "19.69mil (0.500mm)" at 26.662,162.895 h1.52
  text "PTH" at 55.61,162.895 h1.52
  text "Round" at 68.459,162.895 h1.52
  text "Top Layer - Bottom Layer" at 87.098,162.895 h1.52
  text "Via" at 125.186,162.895 h1.52
  text "Rounded" at 140.169,162.895 h1.52
  text "v127h50m0mx0" at 159.112,162.895 h1.52
  text "BOARD SHAPE DIMENSION UNITS: mm" at 293.379,162.666 h1.52
  text "LAYERS: 2 - FCCL (Adhesiveless) (Panasonic R-F775 3 mil PI 2oz)" at 293.379,159.271 h1.52
  text "40" at 12.95,159.085 h1.52
  text "40.00mil (1.016mm)" at 26.662,159.085 h1.52
  text "PTH" at 55.61,159.085 h1.52
  text "Round" at 68.459,159.085 h1.52
  text "Top Layer - Bottom Layer" at 87.098,159.085 h1.52
  text "Pad" at 125.186,159.085 h1.52
  text "Rounded" at 140.169,159.085 h1.52
  text "c178h102m190mx183" at 159.112,159.085 h1.52
  text "LAYER WEIGHT: 2 oz" at 293.379,155.875 h1.52
  text "93 Total" at 12.95,155.275 h1.52
  text "VIAS: Tented" at 293.554,152.48 h1.52
  text "STIFFENERS: 2 (Thickness = 0.265mm including adhesive)" at 293.379,149.593 h1.52
  text "COVERLAY: TAIFLEX FHK 1025" at 293.379,144.674 h1.52
  text "SILKSCREEN: WHITE" at 293.379,141.787 h1.52
  text "BOARD FUNCTION: To tap into battery cell voltages and connect to temperature sensors" at 293.379,137.884 h1.52
  text "Each voltage tap contact will be held down to copper busbars using short M3 screws" at 293.379,133.981 h1.52
Header Stiffener Top Coverlay (Header Stiffener):
  pour cut-out: 57.725,67.2 57.725,23.2 63.05,23.2 63.05,67.2

## Dimensions
170.213,76.822 to 165.213,77.093 on Mechanical 15
170.213,43.675 to 167.213,36.693 on Mechanical 15
170.213,76.822 to 170.213,43.675 on Mechanical 15
170.213,76.822 to 187.013,76.822 on Mechanical 15
70.2,18.783 to 15.154,9.893 on Mechanical 15
66.95,74.155 to 70.2,18.783 on Mechanical 15
51.813,73.675 to 48.813,77.093 on Mechanical 15
51.813,73.675 to 72.415,81.966 on Mechanical 15
153.213,79.093 to 166.952,36.693 on Drill Drawing
167.213,36.693 to 172.013,17.893 on Drill Drawing
206.403,51.693 to 210.403,17.893 on Drill Drawing
226.803,17.893 to 226.803,9.893 on Drill Drawing
172.013,17.893 to 172.013,9.893 on Drill Drawing
75.613,51.893 to 88.003,47.893 on Drill Drawing
48.813,51.893 to 35.154,47.893 on Drill Drawing
15.154,17.893 to 15.154,9.893 on Drill Drawing
108.003,17.893 to 108.003,9.893 on Drill Drawing
230.813,79.093 to 2.013,57.093 on Drill Drawing
17.154,12.293 to 15.154,9.893 on Drill Drawing
13.154,15.893 to 15.554,13.893 on Drill Drawing
14.403,121.893 to 2.013,94.093 on Drill Drawing
238.813,94.093 to 64.213,126.693 on Drill Drawing
238.813,94.093 to 230.813,79.093 on Drill Drawing
14.403,121.893 to 14.403,113.893 on Drill Drawing
48.813,77.093 to 75.613,77.093 on Drill Drawing
4.013,61.093 to 10.55,60.975 on Drill Drawing
12.403,119.893 to 40.803,119.893 on Drill Drawing
208.403,19.893 to 228.803,11.893 on Drill Drawing
170.013,15.893 to 192.013,19.893 on Drill Drawing
165.213,38.693 to 192.013,53.693 on Drill Drawing
192.013,19.893 to 208.403,19.893 on Drill Drawing
202.013,77.093 to 232.813,77.093 on Drill Drawing
192.013,77.093 to 194.013,77.093 on Drill Drawing
163.213,77.093 to 165.213,77.093 on Drill Drawing
124.413,77.093 to 155.213,77.093 on Drill Drawing
85.613,77.093 to 116.413,77.093 on Drill Drawing
75.613,77.093 to 77.613,77.093 on Drill Drawing
46.813,77.093 to 48.813,77.093 on Drill Drawing
8.013,77.093 to 38.813,77.093 on Drill Drawing
232.813,77.093 to 240.813,59.093 on Drill Drawing
194.013,77.093 to 202.013,77.093 on Drill Drawing
155.213,77.093 to 163.213,77.093 on Drill Drawing
116.413,77.093 to 124.413,77.093 on Drill Drawing
77.613,77.093 to 85.613,77.093 on Drill Drawing
38.813,77.093 to 46.813,77.093 on Drill Drawing
0.013,92.093 to 8.013,77.093 on Drill Drawing
35.154,19.893 to 88.003,19.893 on Drill Drawing
143.813,96.093 to 213.413,96.093 on Drill Drawing
66.213,96.093 to 135.813,96.093 on Drill Drawing
40.803,96.093 to 58.213,96.093 on Drill Drawing
0.013,92.093 to 32.803,96.093 on Drill Drawing
213.413,96.093 to 221.413,96.093 on Drill Drawing
135.813,96.093 to 143.813,96.093 on Drill Drawing
58.213,96.093 to 66.213,96.093 on Drill Drawing
32.803,96.093 to 40.803,96.093 on Drill Drawing
0.013,92.093 to 240.813,92.093 on Drill Drawing
110.003,15.893 to 88.003,19.893 on Drill Drawing
13.154,15.893 to 35.154,19.893 on Drill Drawing
15.154,15.893 to 10.084,19.101 on Drill Drawing
37.154,47.893 to 27.991,50.648 on Drill Drawing
76.613,78.825 to 97.587,75.336 on Drill Drawing
47.813,78.825 to 34.341,76.2 on Drill Drawing